# EAGLE board LED-Board_long (EAGLE 9.3.0)
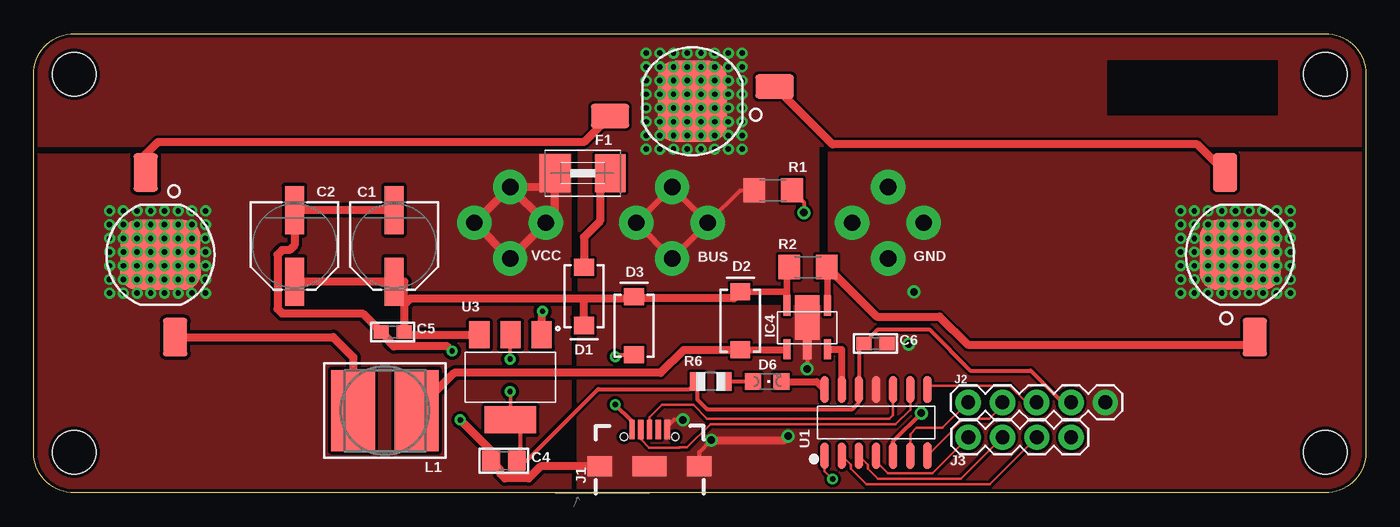
[diagram p0: board, top side]
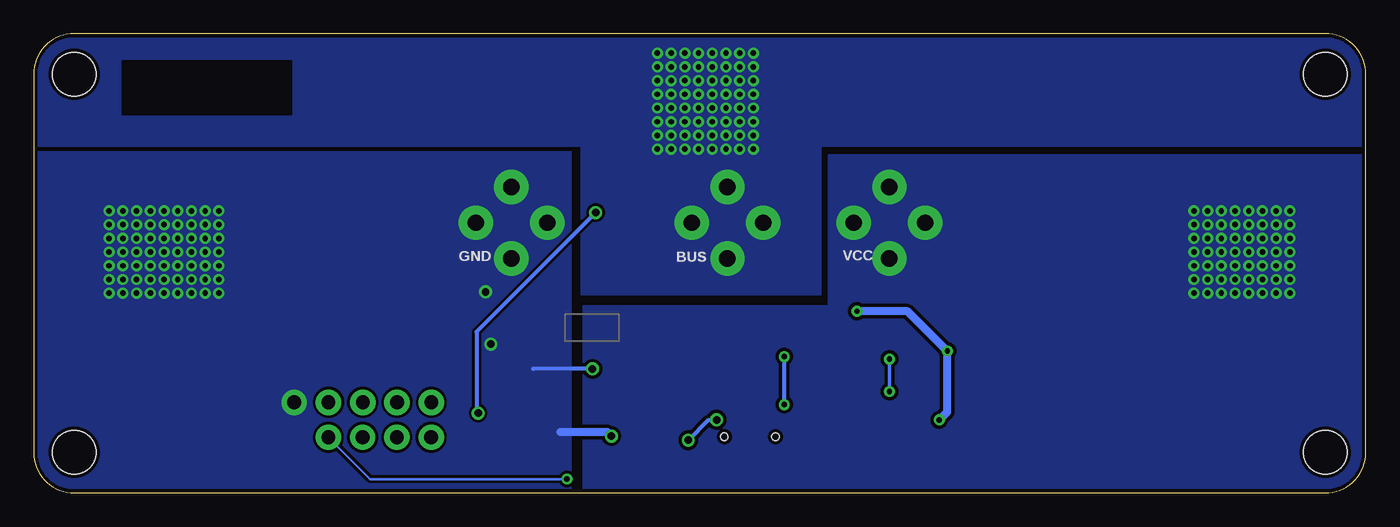
[diagram p1: board, bottom side, seen from below]

Size 98.7 x 34 mm. Coordinates in mm from the lower left corner, seen from the top.
Outline: 0,3 0,31 arc-90 3,34 95.7,34 arc-90 98.7,31 98.7,3 arc-90 95.7,0 3,0 arc-90 0,3
Copper layers (1*16): Top 0.035mm / dielectric 1.5mm / Bottom 0.035mm
Design rules "adafruit-modified-for-pcb-ng *": minimum track width 8mil, minimum drill 15.5mil, track to track 8mil, track to pad 8mil, pad to pad 8mil, via to via 8mil, smd to smd 0mil, copper to edge 11mil, drill to drill 8mil, minimum pad ring 10mil, minimum via ring 8mil, stop-mask expansion 0.116840625mm, vias tented up to drill 20mil, thermal gap 10mil
Net classes: 1 VCC: clearance 0.254 mm
Holes 3.2 mm at 3,3 3,31 95.7,31 95.7,3
tRestrict: area 79.6,28 to 92.2,32
bRestrict: area 79.6,28 to 92.2,32

## Footprints (pad centres in the part's own frame; a part is rotated, then mirrored left to right if it is on the bottom)
PANASONIC_D = smd 3.556 x 1.4: + 2.654,0; - -2.654,0
0805 = smd 1.3 x 1.5: 1 -0.95,0; 2 0.95,0
0603 = smd 1.1 x 1: 1 -0.85,0; 2 0.85,0
SMA-DIODE = smd 1.27 x 1.47: A -2.15,0; C 2.15,0
CHIPLED_0805 = smd 1.2 x 1.2: A 0,-1.05; C 0,1.05
1812 = smd 2.286 x 2.794: 1 -2.046,0; 2 2.046,0
FUSE-HOLDER-5X20MM = drill 1.22 pad 2.54: CLIP-INPUT1 -2.65,0; CLIP-INPUT2 2.65,0
PT4115 = smd 0.5 x 1.5: 1 0,0; 3 3,0; 4 3,3.25; 5 0,3.25 | smd 0.65 x 1.5: 2 1.5,0 | smd 1.8 x 3.3: 2A 1.5,2.375
USB-B-MICRO-SMD = smd 1.45 x 0.4: D+ 2.725,0; D- 2.725,0.65; GND 2.725,-1.3; ID 2.725,-0.65; VBUS 2.725,1.3 | smd 1.5 x 1.8: SHIELD1 0,3.685; SHIELD2 0,-3.685 | smd 1.5 x 2.5: SHIELD3 0,0 | hole 0.55: 2.2,1.9; 2.2,-1.9
1X05 = drill 1.016 pad 1.88: 1 0,0; 2 2.54,0; 3 5.08,0; 4 7.62,0; 5 10.16,0
1X04 = drill 1.016 pad 1.88: 1 0,0; 2 2.54,0; 3 5.08,0; 4 7.62,0
INDUCTOR_6X6MM_TDK_VLC6045 = smd 3.25 x 6: P$1 -2.35,0; P$2 2.35,0
LUXEON = smd 2.85 x 1.8: A -6.1,-1.1; C 6.1,1.1 | smd 5.2 x 6: S 0,0
1206 = smd 1.6 x 1.8: 1 -1.4,0; 2 1.4,0
R0805 = smd 1.1 x 1.4: 1 -1,0; 2 1,0
SOIC127P600X160-14N = smd 2 x 0.6: 1 -2.45,3.81; 2 -2.45,2.54; 3 -2.45,1.27; 4 -2.45,0; 5 -2.45,-1.27; 6 -2.45,-2.54; 7 -2.45,-3.81; 8 2.45,-3.81; 9 2.45,-2.54; 10 2.45,-1.27; 11 2.45,0; 12 2.45,1.27; 13 2.45,2.54; 14 2.45,3.81
SOT230P700X180-4N = smd 1.5 x 2: 1 -2.3,-3.15; 2 0,-3.15; 3 2.3,-3.15 | smd 3.8 x 2: 4 0,3.15

## Placement (x,y rotation side)
C1  47uF  [PANASONIC_D]  26.71,18.29 270 top
C2  100uF  [PANASONIC_D]  19.32,18.29 270 top
C4  10uF  [0805]  34.84,2.38 0 top
C5  10uF  [0603]  26.6,11.91 0 top
C6  1uF  [0603]  62.37,11.05 0 top
D1  3A/40V/500mV  [SMA-DIODE]  40.77,14.54 270 top
D2  3A/40V/500mV  [SMA-DIODE]  52.35,12.74 90 top
D3  3A/40V/500mV  [SMA-DIODE]  44.49,12.37 90 top
D6  [CHIPLED_0805]  54.35,8.24 270 top
F1  TLC-MSMD110/24  [1812]  40.68,23.67 180 top
GND-CLIP  FUSE-HOLDER-5X20MM  [FUSE-HOLDER-5X20MM]  63.3,20 0 bottom
GND-CLIP3  FUSE-HOLDER-5X20MM  [FUSE-HOLDER-5X20MM]  63.3,20 90 bottom
IC4  [PT4115]  55.82,10.62 0 top
J1  [USB-B-MICRO-SMD]  45.63,1.96 90 top
J2  [1X05]  79.4,6.7 180 top
J3  [1X04]  69.25,4.12 0 top
L1  [INDUCTOR_6X6MM_TDK_VLC6045]  26.02,6.08 180 top
LED-1  LUXEONSMD  [LUXEON]  89.38,17.62 90 top
LED-2  LUXEONSMD  [LUXEON]  48.8,29 180 top
LED-3  LUXEONSMD  [LUXEON]  9.39,17.62 270 top
PWM-CLIP  FUSE-HOLDER-5X20MM  [FUSE-HOLDER-5X20MM]  47.3,20 0 bottom
PWM-CLIP1  FUSE-HOLDER-5X20MM  [FUSE-HOLDER-5X20MM]  47.3,20 90 bottom
R1  2k  [1206]  54.78,22.4 0 top
R2  0.3  [1206]  57.37,16.71 180 top
R6  59R  [R0805]  50.16,8.24 180 top
U1  ATSAMD11C14A-SSUT  [SOIC127P600X160-14N]  62.41,5.2 90 top
U3  LDL1117S12R  [SOT230P700X180-4N]  35.32,8.55 180 top
VCC-CLIP  FUSE-HOLDER-5X20MM  [FUSE-HOLDER-5X20MM]  35.3,20 0 bottom
VCC-CLIP3  FUSE-HOLDER-5X20MM  [FUSE-HOLDER-5X20MM]  35.3,19.99 270 bottom

## Library data of the parts
C1 C2 C4-C6 L1 = microbuilder
D1-D3 = SparkFun-DiscreteSemi; PROD_ID: DIO-09886
D6 F1 R6 = Adafruit
GND-CLIP GND-CLIP3 PWM-CLIP PWM-CLIP1 VCC-CLIP VCC-CLIP3 = timon-diverses
IC4 = PT4115
J1 = SparkFun-Connectors; PROD_ID: CONN-11752
J2 = SparkFun-Connectors
J3 = SparkFun-Connectors; PROD_ID: CONN-09696
LED-1-LED-3 = SparkFun-LED
R1 R2 = SparkFun-Resistors
U1 = ATSAMD11C14A-SSUT; AVAILABILITY: Good; DESCRIPTION: Cortex-M0+, 16KB FLASH, 4KB SRAM, USB - 14 SOIC, INDUSTRIAL, GREEN, 1.6-3.6V, 48MHz/ SOIC .150 (SS); MF: Microchip; MP: ATSAMD11C14A-SSUT; PACKAGE: SOIC-14 Microchip; PRICE: 1.18 USD
U3 = LDL1117S12R; AVAILABILITY: Good; DESCRIPTION: 1.2 A High PSRR low dropout linear voltage regulator; MF: STMicroelectronics; MP: LDL1117S12R; PACKAGE: SOT-223 STMicroelectronics; PRICE: 0.22 USD

## Nets
3.3V [VCC]: C4.2 C6.1 J2.2 R6.2 U1.12 U3.2 U3.4
04: D6.C U1.14
BUS: LED-2.S PWM-CLIP1.CLIP-INPUT1 PWM-CLIP1.CLIP-INPUT2 PWM-CLIP.CLIP-INPUT1 PWM-CLIP.CLIP-INPUT2 R1.1
GND: C1.- C2.- C4.1 C5.1 C6.2 GND-CLIP3.CLIP-INPUT1 GND-CLIP3.CLIP-INPUT2 GND-CLIP.CLIP-INPUT1 GND-CLIP.CLIP-INPUT2 IC4.2 IC4.2A J1.GND J1.SHIELD1 J1.SHIELD2 J1.SHIELD3 J2.1 LED-1.S U1.11 U3.1
LED+: IC4.4 LED-1.A R2.1
LED-: L1.P$2 LED-3.C
N$1: D2.A IC4.1 L1.P$1
N$2: LED-1.C LED-2.A
N$3: LED-2.C LED-3.A
N$4 [VCC]: D3.A J1.VBUS
N$5: R1.2 U1.5
N$6: D6.A R6.1
N$7: J3.1 U1.4
N$8: J3.2 U1.3
N$9: J3.3 U1.2
N$12 [VCC]: D1.A F1.1
N$13: J3.4 U1.1
PWM: IC4.3 U1.13
RESET: J2.5 U1.6
SWCLK: J2.4 U1.7
SWDIO: J2.3 U1.8
USB+: J1.D+ U1.10
USB-: J1.D- U1.9
VCC [VCC]: C1.+ C2.+ C5.2 D1.C D2.C D3.C IC4.5 R2.2 U3.3
VCC-RAW [VCC]: F1.2 LED-3.S VCC-CLIP3.CLIP-INPUT1 VCC-CLIP3.CLIP-INPUT2 VCC-CLIP.CLIP-INPUT1 VCC-CLIP.CLIP-INPUT2

## Tracks (layer width: path | path; a pad name or v marks a point on that pad's centre or on a via)
3.3V  (via drill 0.39)
  Top 0.254: U3.4 35.32,7.48 v35.3,7.5 | v35.3,9.9 35.3,11.68 U3.2
  Top 0.305: 35.6,5.13 36.04,4.69 36.04,2.63 C4.2 36.52,2.38 41.82,7.67 48.59,7.67 R6.2 49.16,6.93 49.9,6.2 60.67,6.2 61.14,6.67 U1.12 61.14,10.68 C6.1 | C6.1 61.52,11.37 | J2.2 76.22,6.7 73.87,9.05 69.4,9.05 66.35,12.1 62.56,12.1 C6.1
  Top 0.508: U3.4 35.6,5.13 35.79,4.94
  Bottom 0.254: v35.3,7.5 v35.3,9.9
04
  Top 0.508: D6.C 58.01,8.24 U1.14
BUS  (via drill 0.4)
  Top 0.305: PWM-CLIP.CLIP-INPUT1 50.01,20.06 52.35,22.4 R1.1
  Top 0.483: PWM-CLIP1.CLIP-INPUT2 | 50.01,20.06 50.01,20.05 PWM-CLIP1.CLIP-INPUT1 PWM-CLIP.CLIP-INPUT2 PWM-CLIP1.CLIP-INPUT2 | PWM-CLIP.CLIP-INPUT1 47.94,22.01 PWM-CLIP1.CLIP-INPUT2
  other vias: 45.38,27.48 45.38,26.47 45.38,25.45 46.39,25.45 47.41,25.45 48.42,25.45 49.44,25.45 49.44,26.47 48.42,26.47 47.41,26.47 46.39,26.47 46.39,27.48 47.41,27.48 48.42,27.48 49.44,27.48 50.46,25.45 50.46,26.47 50.46,27.48 51.47,27.48 51.47,26.47 51.47,25.45 52.49,25.45 52.49,26.47 52.49,27.48 52.49,28.5 51.47,28.5 50.46,28.5 49.44,28.5 48.42,28.5 47.41,28.5 46.39,28.5 45.38,28.5 45.38,29.52 46.39,29.52 47.41,29.52 48.42,29.52 49.44,29.52 50.46,29.52 51.47,29.52 52.49,29.52 52.49,30.53 51.47,30.53 50.46,30.53 49.44,30.53 48.42,30.53 47.41,30.53 46.39,30.53 45.38,30.53 45.38,31.55 46.39,31.55 47.41,31.55 48.42,31.55 49.44,31.55 50.46,31.55 51.47,31.55 52.49,31.55 52.49,32.56 51.47,32.56 50.46,32.56 49.44,32.56 48.42,32.56 47.41,32.56 46.39,32.56 45.38,32.56
  pour Top (no thermals): 44.74,33.71 53,33.71 53,24.69 44.74,24.69
  pour Top (no thermals): -1,35.3 -1,25.7 40.4,25.7 40.4,14.7 58.1,14.7 58.1,25.7 100.9,25.7 100.9,35.3
  pour Bottom (no thermals): 99.2,35.3 99.2,25.7 58.1,25.7 58.1,14.7 40.4,14.7 40.4,25.7 -2.5,25.7 -2.5,35.3
GND  (via drill 0.39, 0.4, 0.55)
  Top 0.203: J1.GND 46.93,4.9 46.93,5.16 47.03,5.26
  Top 0.305: IC4.2 57.31,9.19 v57.3,9.18 | J1.SHIELD2 49.31,3.02 v50.2,3.9 | v48.1,5.4 47.43,5.4 46.93,4.9
  Top 0.61: C1.- C2.- 19.32,18.33 18.96,17.97 18.39,17.97 18.06,17.64 18.06,13.62 18.39,13.29 24.36,13.29 C5.1 26.34,11.32 26.34,11.18 26.68,10.84 30.66,10.84 v31,10.5 | J1.SHIELD1 37.56,1.96 36.67,1.07 34.91,1.07 34.58,1.39 34.58,1.68 C4.1 33.89,3.11 v31.6,5.4 | v37.7,13.44 37.62,13.37 U3.1 | v50.2,3.9 55.6,3.9 v55.9,4.2
  Bottom 0.305: v57.3,9.18 61.68,9.18 61.7,9.2 | v50.2,3.9 48.7,5.4 v48.1,5.4
  Bottom 0.61: v31.6,5.4 31,6 v31,10.5 33.94,13.44 v37.7,13.44 | v55.9,4.2 56.2,4.5 59.7,4.5
  other vias: 64.83,11.01 65.22,14.88 91.08,20.88 92.1,20.88 90.06,20.88 89.05,20.88 88.03,20.88 87.02,20.88 86,20.88 92.1,19.86 93.11,20.88 84.98,20.88 84.98,19.86 86,19.86 87.02,19.86 88.03,19.86 89.05,19.86 90.06,19.86 91.08,19.86 84.98,18.85 86,18.85 87.02,18.85 88.03,18.85 89.05,18.85 90.06,18.85 91.08,18.85 92.1,18.85 93.11,19.86 93.11,18.85 84.98,17.83 86,17.83 87.02,17.83 88.03,17.83 89.05,17.83 90.06,17.83 91.08,17.83 92.1,17.83 93.11,17.83 84.98,16.82 86,16.82 87.02,16.82 88.03,16.82 89.05,16.82 90.06,16.82 91.08,16.82 92.1,16.82 93.11,16.82 84.98,15.8 86,15.8 87.02,15.8 88.03,15.8 89.05,15.8 90.06,15.8 91.08,15.8 92.1,15.8 93.11,15.8 84.98,14.78 86,14.78 87.02,14.78 88.03,14.78 89.05,14.78 90.06,14.78 91.08,14.78 92.1,14.78 93.11,14.78
  pour Top (no thermals): 40.3,-1.8 100.9,-1.8 100.9,25.2 58.9,25.2 58.9,13.8 40.3,13.8
  pour Bottom (no thermals): 99.23,25.24 99.23,-2.11 58.88,-2.11 58.88,25.24
LED+
  Top 0.483: IC4.4 58.81,16.71 R2.1
  Top 0.61: 58.81,16.71 62.48,13.05 67.12,13.05 69.2,10.97 90.44,10.97 90.48,10.94 LED-1.A
LED-
  Top 0.61: LED-3.C 22.19,11.52 23.67,10.05 L1.P$2
N$1
  Top 0.508: D2.A 55.81,10.59 IC4.1
  Top 0.61: L1.P$1 31.16,8.87 46.45,8.87 48.17,10.59 48.18,10.59 D2.A
N$2
  Top 0.61: LED-2.A 59.2,25.8 86.2,25.8 LED-1.C
N$3
  Top 0.61: LED-3.A 8.29,25.07 9.19,25.98 40.77,25.98 LED-2.C
N$4  (via drill 0.4)
  Top 0.305: J1.VBUS 44.33,5.29 v43.09,6.53 | v43.09,10.09 43.23,10.22 D3.A
  Bottom 0.305: v43.09,6.53 v43.09,10.09
N$5  (via drill 0.55)
  Top 0.305: R1.2 57.06,21.52 v57.06,20.75 | v65.77,5.89 63.68,3.8 U1.5
  Bottom 0.305: v57.06,20.75 65.9,11.91 65.9,6.02 v65.77,5.89
N$6
  Top 0.305: D6.A R6.1
N$7
  Top 0.203: U1.4 62.41,2.32 63.29,1.44 66.58,1.44 J3.1
N$8
  Top 0.203: U1.3 61.8,2.08 61.8,1.79 62.57,1.03 68.71,1.03 J3.2
N$9
  Top 0.203: U1.2 60.53,2.08 60.53,1.79 61.7,0.63 70.84,0.63 J3.3
N$12
  Top 0.61: F1.1 41.95,22.9 41.95,20.12 40.77,18.94 D1.A
N$13  (via drill 0.4)
  Top 0.203: U1.1 58.6,1.61 v59.19,1.02
  Bottom 0.203: v59.19,1.02 73.77,1.02 J3.4
PWM
  Top 0.508: IC4.3 59.85,10.62 59.85,7.66 U1.13
RESET
  Top 0.203: U1.6 64.95,4.35 65.4,4.8 67.34,4.8 J2.5
SWCLK
  Top 0.203: U1.7 68.01,4.53 68.01,4.63 68.83,5.46 69.76,5.46 69.8,5.5 70.8,5.5 71.78,6.48 J2.4
  Top 0.305: U1.7 66.22,3.62
SWDIO
  Top 0.203: J2.3 73.54,6.7 72.3,7.95 66.52,7.95 U1.8
USB+
  Top 0.203: U1.10 63.68,5.76 63.4,5.48 49.9,5.48 48.87,6.5 46.54,6.5 45.63,5.59 J1.D+
USB-
  Top 0.203: J1.D- 45,4.66 45,3.96 45.6,3.35 47.86,3.35 47.87,3.35 48.42,3.35 50.14,5.07 63.86,5.07 64.95,6.16 U1.9
VCC
  Top 0.483: R2.2 55.81,16.71 IC4.5 55.81,14.89 D2.C
  Top 0.61: 52.06,14.59 D2.C 51.87,14.4 44.49,14.4 | 40.77,14.4 27.92,14.4 27.45,13.93 | 27.45,13.93 C5.2 27.65,11.7 U3.3 | 40.77,14.4 44.49,14.4 | 44.49,14.4 D3.C | D1.C 40.77,14.4 | 27.45,13.93 27.45,15.63 C1.+ C2.+
VCC-RAW  (via drill 0.4)
  Top 0.483: VCC-CLIP3.CLIP-INPUT2 35.3,17.35 | VCC-CLIP.CLIP-INPUT1 37.84,19.89 37.84,20.11 | VCC-CLIP.CLIP-INPUT2
  Top 0.61: VCC-CLIP3.CLIP-INPUT2 37.84,19.89 | VCC-CLIP3.CLIP-INPUT1 37.84,20.11 | VCC-CLIP3.CLIP-INPUT1 VCC-CLIP.CLIP-INPUT2 | VCC-CLIP.CLIP-INPUT2 35.3,17.35 | VCC-CLIP.CLIP-INPUT1 38.63,20.68 F1.2 37.6,22.64 VCC-CLIP3.CLIP-INPUT1
  other vias: 6.64,19.86 7.65,19.86 8.67,19.86 9.68,19.86 10.7,19.86 11.72,19.86 12.73,19.86 12.73,18.85 11.72,18.85 10.7,18.85 9.68,18.85 8.67,18.85 7.65,18.85 6.64,18.85 6.64,17.83 7.65,17.83 8.67,17.83 9.68,17.83 10.7,17.83 11.72,17.83 12.73,17.83 5.62,17.83 5.62,18.85 5.62,19.86 5.62,16.82 6.64,16.82 7.65,16.82 8.67,16.82 9.68,16.82 10.7,16.82 11.72,16.82 12.73,16.82 12.73,15.8 11.72,15.8 10.7,15.8 9.68,15.8 8.67,15.8 7.65,15.8 6.64,15.8 5.62,15.8 5.62,14.78 6.64,14.78 7.65,14.78 8.67,14.78 9.68,14.78 10.7,14.78 11.72,14.78 12.73,14.78 5.62,20.88 6.64,20.88 7.65,20.88 8.67,20.88 9.68,20.88 10.7,20.88 11.72,20.88 12.73,20.88
  pour Top (no thermals): 5.1,21.39 13.35,21.39 13.35,14.02 5.1,14.02
  pour Top (no thermals): -1.03,25.04 -1.03,-1.91 39.82,-1.91 39.82,25.04
  pour Bottom (no thermals): 58,-2.1 -2.6,-2.1 -2.6,25 39.8,25 39.8,13.8 58,13.8

## Text on the board
tNames: VCC | BUS | GND
bNames: VCC | BUS | GND